# Altium PCB Control_Board.PcbDoc (part 2 of 2)
Units mm, origin at the board's own origin, x right, y up, seen from the top; angles counter-clockwise.
Board outline 126.25 x 36.25 mm, 2 copper layers (Top Layer, Bottom Layer); 76 components, 131 nets, 425 pads, 63 vias.
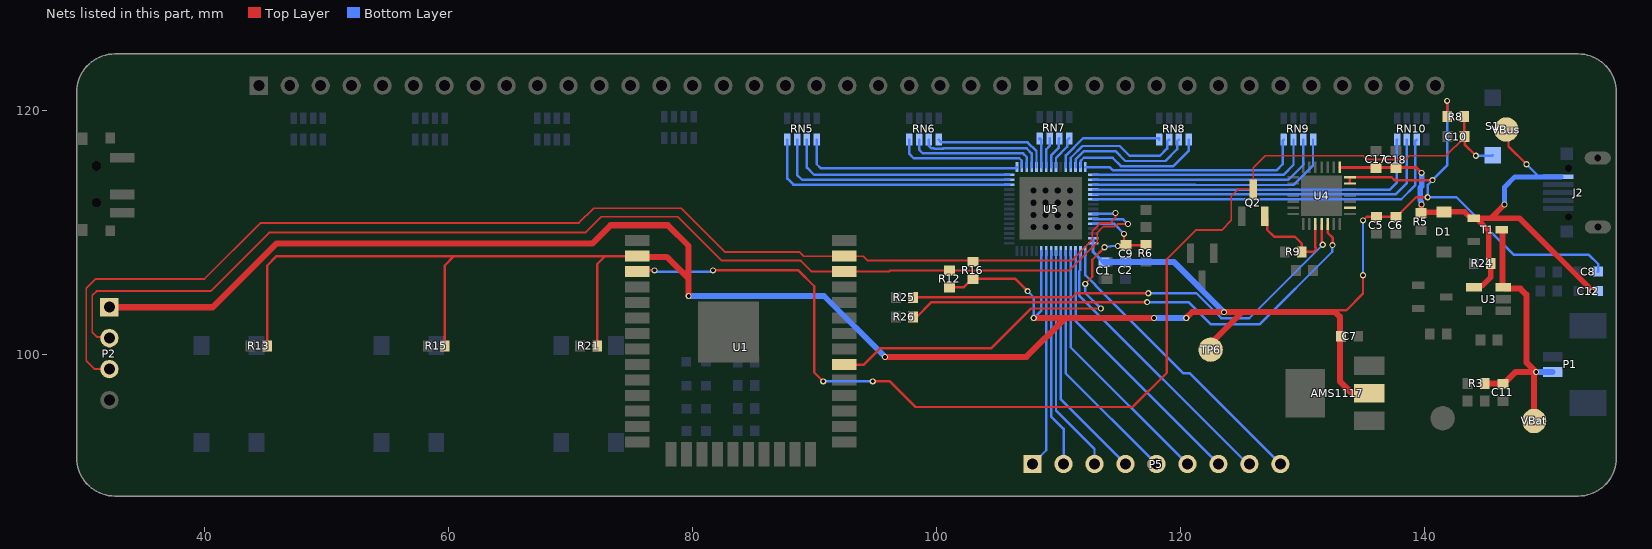
[diagram p2: the nets of this part, all layers, seen from the top]

## Via types
v1: diameter 0.5, hole 0.3, Top Layer to Bottom Layer, 59 vias
v2: diameter 3, hole 3, Top Layer to Bottom Layer, 4 vias

## Nets (pads, with @x,y where several pads share a name; then routed paths per layer and width w, separated by ;. In a path a pad name is that pad's centre, name@x,y a point inside that pad or via, vN(x,y) a via of type N, cw(c..) or ccw(c..) an arc to the next point about the centre after c; other vN are vias at no path point) (continued)
NetRN5_1: RN5.1 U5.46 | length 18.6
  Bottom Layer w0.2: RN5.1@90.2,117.625 90.2,115.6 90.517,115.283 106.533,115.283 U5.46@106.625,115.375
NetRN5_2: RN5.2 U5.45 | length 19.1
  Bottom Layer w0.2: RN5.2@89.4,117.625 89.4,115.33 90,114.73 U5.45@105.98,114.73
NetRN5_3: RN5.3 U5.44 | length 20.4
  Bottom Layer w0.2: RN5.3@88.6,117.625 88.6,114.73 89,114.33 U5.44@105.98,114.33
NetRN5_4: RN5.4 U5.43 | length 21.6
  Bottom Layer w0.2: RN5.4@87.8,117.625 87.8,114.425 88.295,113.93 U5.43@105.98,113.93
NetRN6_1: RN6.1 U5.50 | length 9.7
  Bottom Layer w0.2: RN6.1@100.2,117.625 100.425,117.4 107.5,117.4 108.225,116.675 U5.50@108.225,115.375
NetRN6_2: RN6.2 U5.49 | length 10.3
  Bottom Layer w0.2: RN6.2@99.4,117.625 99.4,117.1 99.6,116.9 99.818,116.9 99.83,116.888 100.57,116.888 100.582,116.9 107.425,116.9 107.825,116.5 U5.49@107.825,115.375
NetRN6_3: RN6.3 U5.48 | length 10.7
  Bottom Layer w0.2: RN6.3@98.6,117.625 98.6,116.8 98.9,116.5 107.125,116.5 107.425,116.2 U5.48@107.425,115.375
NetRN6_4: RN6.4 U5.47 | length 11.1
  Bottom Layer w0.2: RN6.4@97.8,117.625 97.8,116.45 98.15,116.1 106.815,116.1 107.015,115.9 107.015,115.385 U5.47@107.025,115.375
NetRN7_1: RN7.1 U5.54 | length 2.8
  Bottom Layer w0.2: U5.54@109.825,115.375 109.825,116.125 110.735,117.035 110.735,117.56 RN7.1@110.9,117.725
NetRN7_2: RN7.2 U5.53 | length 2.6
  Bottom Layer w0.2: U5.53@109.425,115.375 109.425,116.325 110.04,116.94 110.04,117.665 RN7.2@110.1,117.725
NetRN7_3: RN7.3 U5.52 | length 2.5
  Bottom Layer w0.2: U5.52@109.025,115.375 109.025,116.825 109.3,117.1 RN7.3@109.3,117.725
NetRN7_4: RN7.4 U5.51 | length 2.5
  Bottom Layer w0.2: RN7.4@108.435,117.66 RN7.4@108.5,117.725 108.625,117.6 U5.51@108.625,115.375 U5.51@108.635,115.385
NetRN8_1: RN8.1 U5.59 | length 11.2
  Bottom Layer w0.2: U5.59@111.825,115.375 111.835,115.385 111.835,115.872 112.098,116.135 114.465,116.135 115.15,115.45 119.45,115.45 120.7,116.7 RN8.1@120.7,117.625
NetRN8_2: RN8.2 U5.58 | length 10.8
  Bottom Layer w0.2: U5.58@111.425,115.375 111.435,115.385 111.435,116 112.11,116.675 114.7,116.675 115.503,115.872 118.8,115.872 119.768,116.84 119.768,117.493 RN8.2@119.9,117.625
NetRN8_3: RN8.3 U5.57 | length 10.4
  Bottom Layer w0.2: U5.57@111.025,115.375 111.035,115.385 111.035,116.135 112,117.1 115.05,117.1 115.85,116.3 118.35,116.3 118.935,116.885 118.935,117.46 RN8.3@119.1,117.625
NetRN8_4: RN8.4 U5.56 | length 9.3
  Bottom Layer w0.2: U5.56@110.625,115.375 110.635,115.385 110.635,116.335 112.035,117.735 118.3,117.735 RN8.4@118.3,117.625
NetRN9_1: RN9.1 U5.3 | length 20.8
  Bottom Layer w0.2: U5.3@112.87,113.93 121.225,113.93 121.255,113.9 129.3,113.9 130.9,115.5 RN9.1@130.9,117.625
NetRN9_2: RN9.2 U5.2 | length 19.8
  Bottom Layer w0.2: U5.2@112.87,114.33 128.879,114.33 130.1,115.551 RN9.2@130.1,117.625
NetRN9_3: RN9.3 U5.1 | length 18.8
  Bottom Layer w0.2: U5.1@112.87,114.73 128.468,114.73 129.3,115.562 RN9.3@129.3,117.625
NetRN9_4: RN9.4 U5.60 | length 18.6
  Bottom Layer w0.2: U5.60@112.225,115.375 114.225,115.375 114.5,115.1 127.9,115.1 128.4,115.6 128.4,117.525 RN9.4@128.5,117.625
NetRN10_2: RN10.2 U5.6 | length 30.7
  Bottom Layer w0.2: U5.6@112.87,112.73 138.13,112.73 139.298,113.898 139.298,117.523 RN10.2@139.4,117.625
NetRN10_3: RN10.3 U5.5 | length 29.7
  Bottom Layer w0.2: U5.5@112.87,113.13 137.662,113.13 138.6,114.068 RN10.3@138.6,117.625
NetRN10_4: RN10.4 U5.4 | length 28.7
  Bottom Layer w0.2: U5.4@112.87,113.53 137.206,113.53 137.776,114.1 137.776,117.601 RN10.4@137.8,117.625
RESET: C10.1 Q2.3 R8.2 S1.2 U1.3 | length 98.8
  Top Layer w0.152: 118.9,107.8 121.3,110.2 123.4,110.2 124.2,111 124.2,113 124.75,113.55 Q2.3@126,113.55 126,115.3 127,116.3 135,116.3 135.3,116 138.5,116 138.8,116.3 141.8,116.3 C10.1@143.325,117.825
  Top Layer w0.2: U1.3@75.475,106.795 75.58,106.9 v1(76.9,106.9) ; v1(81.7,106.9) 88.7,106.9 90,105.6 90,98.54 v1(90.74,97.8) ; v1(94.8,97.8) 96.2,97.8 98.3,95.7 116.1,95.7 118.9,98.5 118.9,107.8 ; R8.2@143.3,119.5 143.312,119.488 C10.1@143.312,117.887 ; C10.1@143.325,117.825 143.325,117.225 v1(144.25,116.3)
  Top Layer w0.25: C10.1@143.325,117.825 C10.1@143.325,117.875
  Top Layer w0.5: C10.1@143.312,117.887 C10.1@143.325,117.875
  Bottom Layer w0.2: v1(76.9,106.9) 77.005,106.795 v1@81.7,106.795 ; v1(90.74,97.8) v1(94.8,97.8) ; v1(144.25,116.3) 145.575,116.3 S1.2@145.625,116.35
RI: U4.2
RTS: Q2.2 R9.1 U4.24 | length 8.5
  Top Layer w0.2: Q2.2@126.95,111.35 127.15,111.15 127.15,110.225 127.7,109.675 129.4,109.675 129.976,109.099 R9.1@129.976,108.412 130.937,108.412 131.117,108.592 131.117,108.758 131.1,108.775 U4.24@131.1,110.7
RX_CP: R25.1 U4.25 | length 38.4
  Top Layer w0.2: R25.1@98.5,104.7 104.827,104.7 104.83,104.698 111.157,104.698 111.484,105.025 v1(117.4,105.025) ; U4.25@131.6,110.7 131.6,109.181 131.7,109.081 v1(131.7,109)
  Bottom Layer w0.2: v1(117.4,105.025) 121.339,105.025 123.392,102.973 125.673,102.973 v1(131.7,109)
SCL_ESP: P2.2 R12.2 U1.36 U5.10 | length 99.5
  Top Layer w0.1: R12.2@101.1,106.9 R12.2@101.305,107.105
  Top Layer w0.152: P2.2@32.2,101.34 32.115,101.425 31.2,101.425 30.8,101.825 30.8,104.85 31.15,105.2 40.5,105.2 45.3,110 71.225,110 72.525,111.3 78.8,111.3 82.4,107.7 88.9,107.7 89.805,106.795 U1.36@92.475,106.795 96.145,106.795 96.25,106.9 110.9,106.9 113.2,109.2 113.2,110 113.7,110.5 114.675,110.5 114.875,110.7 v1(115.725,110.7)
  Bottom Layer w0.1: U5.10@112.87,111.13 U5.10@112.872,111.127
  Bottom Layer w0.2: U5.10@112.872,111.127 112.903,111.097 115.328,111.097 v1(115.725,110.7)
SDA_ESP: P2.3 R16.2 U1.37 U5.9 | length 101.3
  Top Layer w0.127: R16.2@103,107.6 103.1,107.7 R16.2@103.125,107.725
  Top Layer w0.152: P2.3@32.2,98.8 31,98.8 30.3,99.5 30.3,105.425 31.075,106.2 40,106.2 44.6,110.8 70.7,110.8 71.9,112 79.1,112 82.7,108.4 88.8,108.4 89.135,108.065 U1.37@92.475,108.065 94.035,108.065 94.4,107.7 103.1,107.7 111.1,107.7 112.8,109.4 112.8,110.1 113.5,110.8 114.3,110.8 114.7,111.2 v1(114.7,111.6)
  Bottom Layer w0.152: v1@114.63,111.53 v1(114.7,111.6)
  Bottom Layer w0.2: U5.9@112.87,111.53 v1@114.63,111.53
SDB: C9.1 R6.2 U1.30 U5.11 | length 36.5
  Top Layer w0.2: U1.30@92.475,99.175 94.075,99.175 95.4,100.5 104.5,100.5 107.775,103.775 v1(113.5,103.775) ; v1(112.225,105.8) 112.8,106.375 112.8,107.775 113.8,108.775 v1(113.8,108.8) ; v1(114.9,108.9) 115.5,108.9 C9.1@115.575,108.975 ; v1(115.4,109.9) 115.4,109.15 C9.1@115.575,108.975 ; R6.2@117.2,109 117.175,108.975 C9.1@115.575,108.975
  Bottom Layer w0.2: v1(112.225,105.8) 112.225,105.05 v1(113.5,103.775) ; U5.11@112.87,110.73 114.57,110.73 v1(115.4,109.9) ; v1(113.8,108.8) 113.857,108.857 114.307,108.857 114.35,108.9 v1(114.9,108.9)
SW1: P5.9 U5.16 | length 24.4
  Bottom Layer w0.2: U5.16@112.225,108.485 112.225,106.51 113.048,105.688 113.048,105.67 120.247,98.471 120.771,98.471 P5.9@128.22,91.022
SW2: P5.8 U5.17 | length 23.4
  Bottom Layer w0.2: U5.17@111.825,108.485 111.825,106.935 111.723,106.832 111.723,104.842 125.542,91.022 P5.8@125.68,91.022
SW3: P5.7 U5.18 | length 22.3
  Bottom Layer w0.2: U5.18@111.425,108.485 111.425,102.737 P5.7@123.14,91.022
SW4: P5.6 U5.19 | length 21.4
  Bottom Layer w0.2: U5.19@111.025,108.485 111.025,100.597 P5.6@120.6,91.022
SW5: P5.5 U5.20 | length 20.5
  Bottom Layer w0.2: U5.20@110.625,108.485 110.625,98.457 P5.5@118.06,91.022
SW6: P5.4 U5.21 | length 19.7
  Bottom Layer w0.2: U5.21@110.225,108.485 110.225,96.317 P5.4@115.52,91.022
SW7: P5.3 U5.22 | length 18.8
  Bottom Layer w0.2: U5.22@109.825,108.485 109.825,95.4 112.98,92.245 P5.3@112.98,91.022
SW8: P5.2 U5.23 | length 17.9
  Bottom Layer w0.2: U5.23@109.425,108.485 109.425,94.925 110.45,93.9 110.45,91.032 P5.2@110.44,91.022
SW9: P5.1 U5.24 | length 17.9
  Bottom Layer w0.2: P5.1@107.9,91.022 109.025,92.147 U5.24@109.025,108.485
TX_CP: R26.1 U4.26 | length 40.6
  Top Layer w0.2: R26.1@98.1,103 98.32,103 99.62,104.3 v1(117.3,104.3) ; U4.26@132.1,110.7 132.1,109.988 132.5,109.587 v1(132.5,108.975)
  Bottom Layer w0.2: v1(117.3,104.3) 120.7,104.3 122.5,102.5 126.553,102.5 132.478,108.425 132.478,108.953 v1(132.5,108.975)
Vbat: C11.2 P1.2 R3.2 T1.3 U3.3 VBat.TP | length 23.7
  Top Layer w0.5: R3.2@144.975,97.625 144.99,97.61 146.46,97.61 C11.2@146.475,97.595 146.525,97.595 147.493,98.563 v1(149.2,98.563) 149.025,98.388 VBat.TP@149.025,94.55 ; T1.3@146.375,110.225 146.387,110.225 146.437,110.175 146.437,105.562 U3.3@146.5,105.5 146.6,105.4 147.9,105.4 148.4,104.9 148.4,99.363 149.163,98.6 v1@149.2,98.6
  Bottom Layer w0.5: v1(149.2,98.563) 149.212,98.575 P1.2@150.55,98.575
VBus: C12.1 C17.2 C18.2 D1.1 J2.1 R5.1 R24.1 T1.1 U3.4 U4.8 VBus.TP | length 46.9
  Top Layer w0.2: VBus.TP@146.75,118.45 146.931,118.269 146.931,117.069 v1(148.4,115.6)
  Top Layer w0.25: U4.8@133.1,115.348 139.352,115.348 v1(139.8,114.9)
  Top Layer w0.45: R5.1@139.75,111.6 139.79,111.64 139.79,112.29 v1(139.8,112.3) ; R5.1@139.8,111.682 141.618,111.682 D1.1@141.625,111.688 143.337,111.688 143.85,111.175 T1.1@144.075,111.175 T1.1@144.3,111.175 ; U3.4@144.1,105.5 144.4,105.5 144.525,105.625 144.75,105.625 145.475,106.35 R24.1@145.475,107.475 145.3,107.65 145.3,110.175 T1.1@144.3,111.175 ; v1(146.6,112.3) 145.475,111.175 ; v1(153.8,105.2) 147.825,111.175 145.475,111.175 ; T1.1@144.3,111.175 145.475,111.175
  Bottom Layer w0.2: v1(148.4,115.6) 149.243,114.757 149.243,114.573
  Bottom Layer w0.4: v1(146.6,112.3) 146.6,113.727 147.446,114.573 149.243,114.573 ; 149.253,114.562 J2.1@151.225,114.562
  Bottom Layer w0.45: v1(139.8,112.3) 139.79,112.31 139.79,112.522 139.673,112.64 139.673,113.687 139.8,113.815 v1(139.8,114.9)
VCC3V3: AMS1117.2 C1.2 C2.2 C5.2 C6.2 C7.2 C8.1 P2.1 R8.1 R12.1 R13.2 R15.2 R16.1 R21.2 TP6.TP U1.2 U4.6 U4.7 U5.14 U5.15 U5.25 | length 264.8
  Top Layer w0.2: R13.2@45.15,100.7 45.15,107.3 45.915,108.065 60.465,108.065 ; R15.2@59.7,100.7 59.7,107.3 60.465,108.065 ; R21.2@72.2,100.7 72.2,107.4 72.865,108.065 ; U1.2@75.475,108.065 72.865,108.065 ; R12.1@101.1,105.5 102.25,105.5 102.95,106.2 R16.1@103,106.2 106.5,106.2 v1(107.5,105.2) ; 132.4,103.475 132.55,103.625 133.625,103.625 135,105 v1(135,106.5) ; C7.2@133.2,101.5 133.2,103.2 ; U4.6@133.924,114.024 U4.7@133.924,114.524 137.35,114.524 137.574,114.3 v1(140.7,114.3) ; v1(135,111) 135.3,111.3 C5.2@136.1,111.3 C6.2@137.7,111.3 137.75,111.3 139.35,112.9 v1(140.3,112.9) ; R8.1@141.9,119.5 v1(141.9,120.8) ; 60.465,108.065 72.865,108.065
  Top Layer w0.5: P2.1@32.2,103.88 40.68,103.88 45.9,109.1 71.8,109.1 73.3,110.6 78,110.6 79.7,108.9 79.7,106.2 ; U1.2@75.475,108.065 75.54,108 77.9,108 79.7,106.2 ; v1(79.7,104.8) 79.7,106.2 ; v1(95.8,99.8) 107.4,99.8 110.59,102.99 ; v1(108,103) 110.58,103 110.59,102.99 ; v1(117.86,102.99) 110.59,102.99 ; v1(120.5,103) 120.975,103.475 v1(123.6,103.475) 125.075,103.475 ; TP6.TP@122.3,100.7 125.075,103.475 ; AMS1117.2@135.525,96.825 135.5,96.8 134.1,96.8 133.1,97.8 133.1,103.1 132.725,103.475 132.4,103.475 125.075,103.475
  Bottom Layer w0.2: v1(107.5,105.2) 108,104.7 v1(108,103) 108.625,103.625 U5.25@108.625,108.485 ; v1(135,106.5) v1(135,111) ; v1(140.3,112.9) v1@140.312,112.9 ; v1(141.9,120.8) 141.9,115.5 v1(140.7,114.3) 140.7,114.298 140.312,113.91 v1@140.312,112.9 ; C8.1@154.262,106.8 154.3,106.838 154.3,107.4 153.5,108.2 147.351,108.2 142.651,112.9 v1@140.312,112.9
  Bottom Layer w0.25: U5.14@112.87,109.53 U5.15@112.87,109.13 112.87,108.405 113.7,107.575 C1.2@113.75,107.575 ; C2.2@115.5,107.575 C2.2@115.525,107.6
  Bottom Layer w0.5: v1(79.7,104.8) 90.8,104.8 v1(95.8,99.8) ; C1.2@113.75,107.575 113.763,107.588 115.488,107.588 C2.2@115.5,107.575 ; C2.2@115.525,107.6 119.475,107.6 v1(123.6,103.475) ; v1(117.86,102.99) 120.49,102.99 v1(120.5,103)
pads on no net: 3.1 3.GND@1 3.GND@2 3.GND@3 3.GND@4 AMS1117. J2. J2.4 P1.MP1 P1.MP2 RN10.1 RN10.8 U1.1 U1.6 U1.8 U1.9 U1.14 U1.16 U1.17 U1.18 U1.19 U1.20 U1.21 U1.22 U1.24 U1.26 U1.29 U1.31 U1.32 U1.33 U4.9 U4.10 U4.11 U4.12 U4.13 U4.14 U4.15 U4.16 U4.17 U4.18 U4.19 U4.20 U4.21 U4.22 U4.29 U5.61
copper on no net: | length 104.8
  Bottom Layer w0.085: 130.668,90.933 131.007,90.933 ; 130.668,91.018 130.922,91.018 ; 130.668,91.102 130.922,91.102 ; 130.668,91.187 130.922,91.187 ; 130.668,91.272 130.922,91.272 ; 130.668,91.356 130.922,91.356 ; 130.668,91.441 131.007,91.441 ; 130.753,90.763 131.092,90.763 ; 130.753,90.848 131.007,90.848 ; 130.753,91.526 131.515,91.526 ; 130.837,90.679 131.176,90.679 ; 130.922,90.509 131.261,90.509 ; 130.922,90.594 131.176,90.594 ; 130.922,91.611 131.346,91.611 ; 131.007,90.424 131.346,90.424 ; 131.007,91.018 131.6,91.018 ; 131.092,90.933 131.515,90.933 ; 131.176,91.441 131.6,91.441 ; 131.261,91.102 131.6,91.102 ; 131.346,91.187 131.6,91.187 ; 131.346,91.272 131.6,91.272 ; 131.346,91.356 131.6,91.356 ; 132.108,90.424 132.363,90.424 ; 132.108,90.509 132.363,90.509 ; 132.108,90.594 132.363,90.594 ; 132.108,90.679 132.363,90.679 ; 132.108,90.763 132.363,90.763 ; 132.108,90.848 132.363,90.848 ; 132.108,90.933 132.363,90.933 ; 132.108,91.018 132.363,91.018 ; 132.108,91.102 132.363,91.102 ; 132.108,91.187 132.363,91.187 ; 132.108,91.272 132.363,91.272 ; 132.108,91.356 132.363,91.356 ; 132.108,91.441 132.532,91.441 ; 132.108,91.526 132.532,91.526 ; 132.108,91.611 132.363,91.611 ; 132.447,91.356 132.532,91.356 ; 132.956,90.424 133.295,90.424 ; 132.956,91.272 133.295,91.272 ; 133.04,90.509 133.295,90.509 ; 133.04,91.187 133.379,91.187 ; 133.125,90.594 133.379,90.594 ; 133.125,91.102 133.379,91.102 ; 133.21,90.679 133.464,90.679 ; 133.21,91.018 133.464,91.018 ; 133.295,90.763 133.549,90.763 ; 133.295,90.848 133.549,90.848 ; 133.295,90.933 133.549,90.933 ; 133.549,91.441 133.803,91.441 ; 133.549,91.526 133.803,91.526 ; 133.549,91.611 133.803,91.611 ; 133.634,90.424 133.888,90.424 ; 133.634,90.509 133.888,90.509 ; 133.634,90.594 133.803,90.594 ; 133.634,90.679 133.803,90.679 ; 133.634,90.763 133.803,90.763 ; 133.634,90.848 133.803,90.848 ; 133.634,90.933 133.803,90.933 ; 133.634,91.018 133.803,91.018 ; 133.634,91.102 133.803,91.102 ; 133.634,91.187 133.803,91.187 ; 133.634,91.272 133.803,91.272 ; 133.634,91.356 133.803,91.356 ; 134.142,90.424 135.074,90.424 ; 134.142,90.509 135.074,90.509 ; 134.142,91.187 134.396,91.187 ; 134.142,91.272 134.396,91.272 ; 134.142,91.356 134.396,91.356 ; 134.142,91.441 134.566,91.441 ; 134.142,91.526 134.905,91.526 ; 134.227,91.018 134.566,91.018 ; 134.227,91.102 134.481,91.102 ; 134.311,90.933 134.65,90.933 ; 134.311,91.611 134.82,91.611 ; 134.396,90.848 134.735,90.848 ; 134.481,90.763 134.82,90.763 ; 134.566,90.679 134.905,90.679 ; 134.65,90.594 134.989,90.594 ; 134.82,91.441 134.989,91.441 ; 135.752,90.679 135.921,90.679 ; 135.752,90.763 135.921,90.763 ; 135.752,90.848 136.43,90.848 ; 135.752,90.933 136.091,90.933 ; 135.752,91.018 136.006,91.018 ; 135.752,91.102 136.006,91.102 ; 135.752,91.187 136.515,91.187 ; 135.837,90.424 136.006,90.424 ; 135.837,90.509 136.006,90.509 ; 135.837,90.594 136.006,90.594 ; 135.921,91.272 136.43,91.272 ; 136.091,90.509 136.176,90.509 ; 136.176,90.424 136.599,90.424 ; 136.26,90.763 136.599,90.763 ; 136.345,90.509 136.684,90.509 ; 136.43,90.594 136.684,90.594 ; 136.43,90.679 136.684,90.679 ; 136.853,90.594 137.108,90.594 ; 136.853,90.679 137.108,90.679 ; 136.853,90.763 137.108,90.763 ; 136.853,90.848 137.023,90.848 ; 136.853,90.933 137.023,90.933 ; 136.853,91.018 137.108,91.018 ; 136.853,91.102 137.192,91.102 ; 136.853,91.187 137.531,91.187 ; 136.938,90.424 137.108,90.424 ; 136.938,90.509 137.108,90.509 ; 137.023,91.272 137.447,91.272 ; 137.447,91.102 137.87,91.102 ; 137.531,91.018 137.87,91.018 ; 137.616,90.763 137.87,90.763 ; 137.616,90.848 137.87,90.848 ; 137.616,90.933 137.87,90.933 ; 137.616,91.187 137.785,91.187 ; 137.616,91.272 137.785,91.272 ; 137.616,91.356 137.785,91.356 ; 137.616,91.441 137.785,91.441 ; 137.616,91.526 137.785,91.526 ; 137.616,91.611 137.785,91.611 ; 137.701,90.424 137.87,90.424 ; 137.701,90.509 137.87,90.509 ; 137.701,90.594 137.87,90.594 ; 137.701,90.679 137.87,90.679 ; 138.124,90.763 138.379,90.763 ; 138.124,90.848 138.379,90.848 ; 138.124,90.933 138.379,90.933 ; 138.124,91.018 138.379,91.018 ; 138.124,91.102 138.379,91.102 ; 138.124,91.187 138.294,91.187 ; 138.124,91.272 138.294,91.272 ; 138.124,91.356 138.294,91.356 ; 138.124,91.441 138.294,91.441 ; 138.124,91.526 138.294,91.526 ; 138.124,91.611 138.294,91.611 ; 138.209,90.424 138.379,90.424 ; 138.209,90.509 138.379,90.509 ; 138.209,90.594 138.379,90.594 ; 138.209,90.679 138.379,90.679 ; 138.633,90.679 138.802,90.679 ; 138.633,90.763 138.802,90.763 ; 138.633,90.848 139.311,90.848 ; 138.633,90.933 138.972,90.933 ; 138.633,91.018 138.887,91.018 ; 138.633,91.102 138.887,91.102 ; 138.633,91.187 139.395,91.187 ; 138.718,90.424 138.887,90.424 ; 138.718,90.509 138.887,90.509 ; 138.718,90.594 138.887,90.594 ; 138.802,91.272 139.311,91.272 ; 138.972,90.509 139.056,90.509 ; 139.056,90.424 139.48,90.424 ; 139.141,90.763 139.48,90.763 ; 139.226,90.509 139.565,90.509 ; 139.311,90.594 139.565,90.594 ; 139.311,90.679 139.565,90.679 ; 139.565,91.187 140.158,91.187 ; 139.565,91.272 139.819,91.272 ; 139.734,91.102 140.158,91.102 ; 139.819,91.018 140.158,91.018 ; 139.904,90.848 140.158,90.848 ; 139.904,90.933 140.158,90.933 ; 139.904,91.272 140.158,91.272 ; 139.989,90.424 140.243,90.424 ; 139.989,90.509 140.158,90.509 ; 139.989,90.594 140.158,90.594 ; 139.989,90.679 140.158,90.679 ; 139.989,90.763 140.158,90.763 ; 140.412,90.763 140.666,90.763 ; 140.412,90.848 140.666,90.848 ; 140.412,90.933 140.666,90.933 ; 140.412,91.018 140.666,91.018 ; 140.412,91.102 140.582,91.102 ; 140.412,91.187 140.582,91.187 ; 140.412,91.272 140.582,91.272 ; 140.497,90.424 140.666,90.424 ; 140.497,90.509 141.429,90.509 ; 140.497,90.594 140.751,90.594 ; 140.497,90.679 140.666,90.679 ; 140.751,90.424 141.344,90.424 ; 141.09,90.594 141.429,90.594 ; 141.09,91.187 141.344,91.187 ; 141.09,91.272 141.344,91.272 ; 141.175,90.679 141.429,90.679 ; 141.175,90.763 141.429,90.763 ; 141.175,90.848 141.344,90.848 ; 141.175,90.933 141.344,90.933 ; 141.175,91.018 141.344,91.018 ; 141.175,91.102 141.344,91.102 ; 141.683,90.933 141.937,90.933 ; 141.683,91.018 141.937,91.018 ; 141.683,91.102 141.937,91.102 ; 141.683,91.187 141.853,91.187 ; 141.683,91.272 141.853,91.272 ; 141.683,91.356 141.853,91.356 ; 141.683,91.441 142.107,91.441 ; 141.683,91.526 142.107,91.526 ; 141.683,91.611 142.022,91.611 ; 141.768,90.424 141.937,90.424 ; 141.768,90.509 141.937,90.509 ; 141.768,90.594 141.937,90.594 ; 141.768,90.679 141.937,90.679 ; 141.768,90.763 141.937,90.763 ; 141.768,90.848 141.937,90.848 ; 141.937,91.272 142.192,91.272 ; 141.937,91.356 142.192,91.356 ; 142.022,91.102 142.276,91.102 ; 142.022,91.187 142.192,91.187 ; 142.107,90.933 142.361,90.933 ; 142.107,91.018 142.276,91.018 ; 142.192,90.763 142.446,90.763 ; 142.192,90.848 142.361,90.848 ; 142.276,90.509 142.615,90.509 ; 142.276,90.594 142.615,90.594 ; 142.276,90.679 142.7,90.679 ; 142.361,90.424 142.615,90.424 ; 142.531,90.763 142.7,90.763 ; 142.531,90.848 142.7,90.848 ; 142.531,90.933 142.7,90.933 ; 142.531,91.018 142.785,91.018 ; 142.615,91.102 142.785,91.102 ; 142.615,91.187 142.785,91.187 ; 142.615,91.272 143.124,91.272 ; 142.7,91.356 143.124,91.356 ; 142.7,91.441 143.124,91.441 ; 142.7,91.526 143.124,91.526 ; 142.7,91.611 143.124,91.611 ; 142.869,91.187 143.124,91.187 ; 142.954,90.424 143.208,90.424 ; 142.954,90.509 143.208,90.509 ; 142.954,90.594 143.124,90.594 ; 142.954,90.679 143.124,90.679 ; 142.954,90.763 143.124,90.763 ; 142.954,90.848 143.124,90.848 ; 142.954,90.933 143.124,90.933 ; 142.954,91.018 143.124,91.018 ; 142.954,91.102 143.124,91.102 ; 143.886,90.594 144.225,90.594 ; 143.886,90.679 144.14,90.679 ; 143.886,90.763 144.056,90.763 ; 143.886,90.848 144.056,90.848 ; 143.886,90.933 144.056,90.933 ; 143.886,91.018 144.14,91.018 ; 143.886,91.102 144.225,91.102 ; 143.971,90.509 144.734,90.509 ; 143.971,91.187 144.734,91.187 ; 144.056,90.424 144.649,90.424 ; 144.14,91.272 144.564,91.272 ; 144.395,91.102 144.734,91.102 ; 144.479,90.594 144.818,90.594 ; 144.564,90.679 144.818,90.679 ; 144.564,90.933 144.818,90.933 ; 144.564,91.018 144.818,91.018 ; 144.649,90.763 144.818,90.763 ; 144.649,90.848 144.818,90.848 ; 145.073,90.509 145.75,90.509 ; 145.073,90.594 145.327,90.594 ; 145.073,90.679 145.327,90.679 ; 145.073,91.102 145.157,91.102 ; 145.073,91.187 145.666,91.187 ; 145.157,90.424 145.75,90.424 ; 145.157,90.763 145.411,90.763 ; 145.157,91.272 145.581,91.272 ; 145.242,90.848 145.581,90.848 ; 145.411,90.933 145.666,90.933 ; 145.411,91.102 145.666,91.102 ; 145.496,91.018 145.666,91.018 ; 145.92,90.594 146.174,90.594 ; 145.92,90.679 146.174,90.679 ; 145.92,90.763 146.089,90.763 ; 145.92,90.848 146.089,90.848 ; 145.92,90.933 146.089,90.933 ; 145.92,91.018 146.174,91.018 ; 145.92,91.102 146.259,91.102 ; 145.92,91.187 146.852,91.187 ; 146.005,90.424 146.174,90.424 ; 146.005,90.509 146.174,90.509 ; 146.089,91.272 146.428,91.272 ; 146.513,91.102 146.852,91.102 ; 146.598,91.018 146.852,91.018 ; 146.682,90.679 146.937,90.679 ; 146.682,90.763 146.937,90.763 ; 146.682,90.848 146.937,90.848 ; 146.682,90.933 146.852,90.933 ; 146.682,91.272 146.852,91.272 ; 146.767,90.424 146.937,90.424 ; 146.767,90.509 146.937,90.509 ; 146.767,90.594 146.937,90.594 ; 147.191,90.594 147.53,90.594 ; 147.191,90.679 147.445,90.679 ; 147.191,90.763 147.36,90.763 ; 147.191,90.848 147.36,90.848 ; 147.191,90.933 147.36,90.933 ; 147.191,91.018 147.445,91.018 ; 147.191,91.102 147.53,91.102 ; 147.276,90.509 148.038,90.509 ; 147.276,91.187 148.038,91.187 ; 147.36,90.424 147.953,90.424 ; 147.445,91.272 147.869,91.272 ; 147.699,91.102 148.038,91.102 ; 147.784,90.594 148.123,90.594 ; 147.869,90.679 148.123,90.679 ; 147.869,90.933 148.123,90.933 ; 147.869,91.018 148.123,91.018 ; 147.953,90.763 148.123,90.763 ; 147.953,90.848 148.123,90.848 ; 148.208,91.526 148.292,91.526 ; 148.208,91.611 148.631,91.611 ; 148.292,91.187 148.885,91.187 ; 148.292,91.272 148.885,91.272 ; 148.377,91.526 148.716,91.526 ; 148.462,90.848 148.716,90.848 ; 148.462,90.933 148.716,90.933 ; 148.462,91.018 148.716,91.018 ; 148.462,91.102 148.716,91.102 ; 148.462,91.356 148.716,91.356 ; 148.462,91.441 148.716,91.441 ; 148.547,90.424 148.801,90.424 ; 148.547,90.509 148.801,90.509 ; 148.547,90.594 148.716,90.594 ; 148.547,90.679 148.716,90.679 ; 148.547,90.763 148.716,90.763 ; 148.97,90.424 149.224,90.424 ; 148.97,90.509 149.309,90.509 ; 149.055,90.594 149.309,90.594 ; 149.055,90.679 149.309,90.679 ; 149.055,90.763 149.394,90.763 ; 149.14,90.848 150.156,90.848 ; 149.14,90.933 150.072,90.933 ; 149.224,91.018 149.479,91.018 ; 149.224,91.102 149.479,91.102 ; 149.224,91.187 149.479,91.187 ; 149.309,91.272 149.479,91.272 ; 149.309,91.356 149.563,91.356 ; 149.309,91.441 149.818,91.441 ; 149.394,91.526 149.818,91.526 ; 149.394,91.611 149.733,91.611 ; 149.648,91.272 149.902,91.272 ; 149.648,91.356 149.902,91.356 ; 149.733,91.018 150.072,91.018 ; 149.733,91.102 149.987,91.102 ; 149.733,91.187 149.987,91.187 ; 149.902,90.679 150.241,90.679 ; 149.902,90.763 150.156,90.763 ; 149.987,90.509 150.326,90.509 ; 149.987,90.594 150.241,90.594 ; 150.072,90.424 150.326,90.424
  Bottom Layer w0.127: 108.99,110.88 109.79,111.68 ; 110.59,112.48 109.79,111.68 ; 111.39,110.08 109.79,111.68
  other v2: 32.65,91.522 152.65,91.522 32.65,121.522 152.65,121.522

## Polygon pours and split planes (outlines as drawn)
GND on Bottom Layer "GND" (solid, shelved, pour order 14): 29.41,91.447 ccw(c32.532,91.447) 32.532,88.325 152.543,88.325 ccw(c152.543,91.445) 155.663,91.445 155.663,121.445 ccw(c152.535,121.447) 152.537,124.575 32.863,124.575 ccw(c32.567,121.431) 29.423,121.726
no net on Bottom Layer "GND" (solid, pour order 8): 152.625,124.65
GND on Top Layer "GND" (solid, pour order 60): 155.65,111.422 155.625,91.321 cw(c152.689,91.46) 152.55,88.524 32.75,88.524 cw(c32.602,91.469) 29.657,91.321 29.65,121.647 cw(c32.638,121.534) 32.75,124.522 152.75,124.522 cw(c152.675,121.572) 155.625,121.497 155.65,119.647
NetAMS1117_3 on Top Layer "NETAMS1117_3_L01_P054" (solid, pour order 54): 141.337,104.5 141.337,100.837 140.408,99.908 134.115,99.86 134.115,98.2 136.825,98.25 137.349,97.849 137.35,92.8 142.397,92.8 142.8,93.203 142.8,106.404 143.421,107.025 143.421,107.7 141.628,107.7 141.35,107.422
GND on Top Layer "NONET_L-01_P-001" (solid, shelved, pour order 56): 29.5,124.7 29.5,88.5 155.8,88.5 155.8,124.7
NetAMS1117_3 on Top Layer "NETAMS1117_3_L01_P048" (solid, pour order 48): 141.3,105.025 141.375,104.95 141.375,102.6 140.975,102.2 140.975,101.25 143.135,101.25 143.225,101.34 142.575,101.99 142.575,106.625 142.725,106.625 143.15,107.05 143.175,107.025 144.5,107.025 144.5,107.9 144.475,107.925 144.25,107.7 141.6,107.7 141.6,107.672 141.35,107.422 141.375,107.397 141.375,105.025
GND on Top Layer "GND" (solid, shelved, pour order 38): 29.456,98.723 cw(c29.456,98.673) 29.506,98.673 29.506,91.443 ccw(c32.584,91.443) 32.584,88.366 152.231,88.366 ccw(c152.566,91.533) 155.734,91.198 155.714,121.122 ccw(c152.548,121.431) 152.856,124.598 32.584,124.598 ccw(c32.584,121.47) 29.456,121.47 29.406,107.423
no net on Top Layer "NONET_L01_P050" (solid, pour order 50): 106.911,114.45
no net on Top Layer "GND" (solid, pour order 26): 29.5,94.25
no net on Top Solder "R22_1" (solid): 112.05,109.325 112.05,114.55 106.775,114.55 106.825,114.5 106.825,109.325

## Silkscreen, mask and mechanical layers (free items; w line width, h text height)
Bottom Overlay:
  drawing of 12672 lines, arcs and shapes, not listed
Bottom Solder:
  drawing of 346 lines, arcs and shapes, not listed
Mechanical 1:
  lines w0.254: 29.65,91.522 ccw(c32.65,91.522) 32.65,88.522 152.65,88.522 ccw(c152.65,91.522) 155.65,91.522 155.65,121.522 ccw(c152.65,121.522) 152.65,124.522 32.65,124.522 ccw(c32.65,121.522) 29.65,121.522 29.65,91.522
Mechanical 14:
  lines w0.254: 32.65,124.497 152.65,124.497 ; 32.65,124.522 ccw(c32.65,121.522) 29.65,121.522 29.65,91.522 ccw(c32.65,91.522) 32.65,88.522 152.65,88.522 ccw(c152.65,91.522) 155.65,91.522 155.65,121.522 ccw(c152.65,121.522) 152.65,124.522

## Text inside footprints (layer, text, board x,y; h text height)
U1: Mechanical 1 "ANTENNA" at 78.25,112.476 h1
U4: Mechanical 13 "*" at 133.759,111.909 h1 r180